# Altium PCB MB1520.PcbDoc (part 7 of 7)
Units mm, origin at the board's own origin, x right, y up, seen from the top; angles counter-clockwise.
Board outline 159 x 88 mm, 6 copper layers (Top Layer, Signal Layer 1, Signal Layer 2, Signal Layer 3, Signal Layer 4, Bottom Layer), stack 1.572 mm thick; 473 components, 377 nets, 1832 pads, 1378 vias.
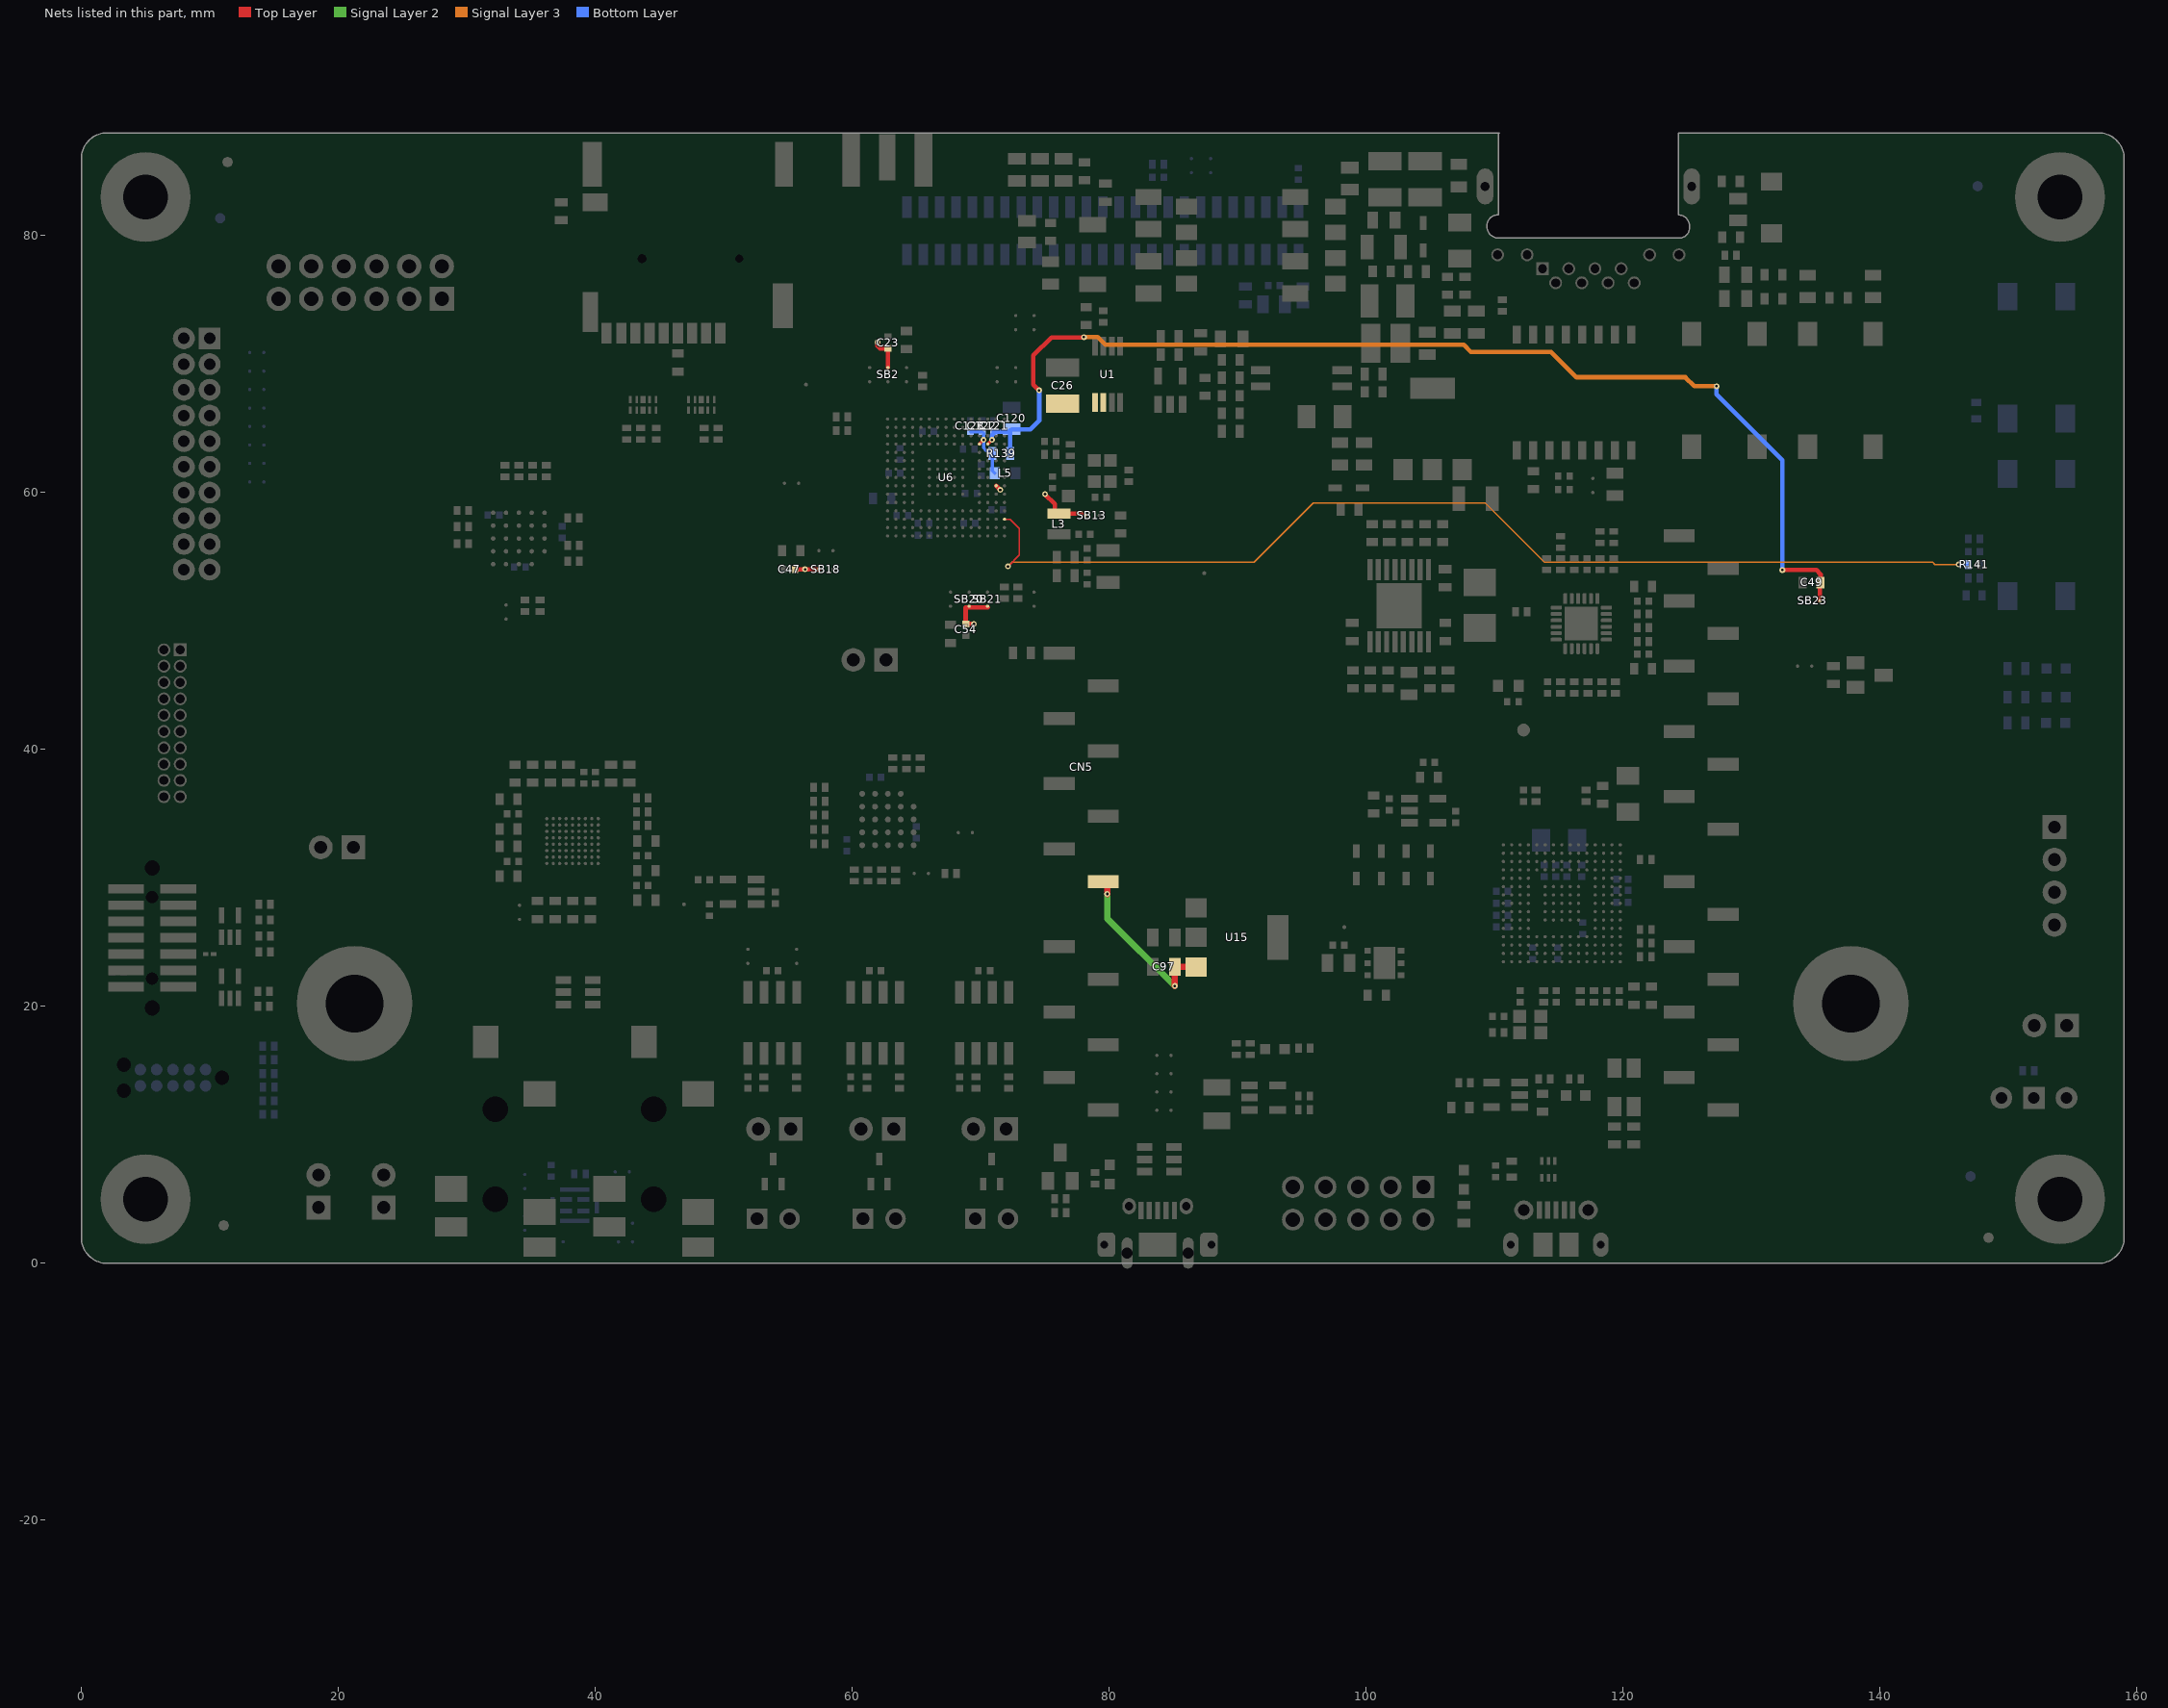
[diagram p10: the nets of this part, all layers, seen from the top]

## Via types
v1: diameter 0.45, hole 0.2, Top Layer to Bottom Layer, tented both sides, 1099 vias
v2: diameter 0.25, hole 0.1, Top Layer to Signal Layer 1, tented both sides, 217 vias
v3: diameter 0.25, hole 0.1, Signal Layer 4 to Bottom Layer, tented both sides, 53 vias
v4: diameter 0.6, hole 0.3, Top Layer to Bottom Layer, tented both sides, 9 vias

## Nets (pads, with @x,y where several pads share a name; then routed paths per layer and width w, separated by ;. In a path a pad name is that pad's centre, name@x,y a point inside that pad or via, vN(x,y) a via of type N, cw(c..) or ccw(c..) an arc to the next point about the centre after c; other vN are vias at no path point) (continued)
VDD_SDC: C23.1 C47.1 C54.1 L3.1 SB2.1 SB13.2 SB18.1 SB20.1 SB21.1 U6.G2 | length 12.3
  Top Layer w0.127: L3.1@75.775,58.65 L3.1@76.075,58.35
  Top Layer w0.35: C47.1@55.575,54.025 SB18.1@57.4,54.025 ; v1(61.975,71.7) 61.975,71.4 62.15,71.225 C23.1@62.775,71.225 SB2.1@62.775,69.725 ; C54.1@68.825,49.8 68.825,51.05 SB21.1@70.55,51.05 ; C54.1@68.85,49.775 v1(69.475,49.775) ; U6.G2@71.2,60.525 v1(71.525,60.2) ; v1(75,59.875) 75.775,59.1 L3.1@75.775,58.65 ; L3.1@76.075,58.35 77.85,58.35
  other v1: 56.325,54.025
VDDA: C122.2 C123.1 L5.2 R139.2 U6.M4 | length 5.2
  Top Layer w0.25: U6.M4@69.9,63.775 v1(70.225,64.1)
  Bottom Layer w0.25: C123.1@69.2,64.725 C122.2@70.125,64.725 70.225,64.625 v1(70.225,64.1) 70.225,63.475 70.432,63.268 70.682,63.268 R139.2@70.9,63.05 70.9,61.7 L5.2@71.1,61.5
VIN: C97.2 CN5.8 U15.3 | length 14
  Top Layer w0.508: CN5.8@79.54,29.72 79.85,29.411 v1(79.85,28.75) ; v1(85.1,21.596) C97.2@85.1,23.475 ; C97.2@85.1,23.075 U15.3@86.775,23.075
  Signal Layer 2 w0.508: v1(79.85,28.75) 79.85,26.846 v1(85.1,21.596)
VREF+: C26.2 C49.2 C120.2 C121.2 R139.1 SB23.2 U1.5 U1.6 U6.M3 | length 89
  Top Layer w0.25: U6.M3@70.55,63.775 v1(70.875,64.1)
  Top Layer w0.35: v1(74.55,67.95) 74.1,68.4 74.1,70.675 75.5,72.075 78,72.075 v1(78.025,72.1) ; v1(132.4,53.975) 135.05,53.975 135.375,53.65 C49.2@135.375,53 135.325,52.95 SB23.2@135.325,51.575
  Signal Layer 3 w0.35: v1(78.025,72.1) 79.1,72.1 79.7,71.5 107.6,71.5 108.15,70.95 114.4,70.95 116.375,68.975 124.85,68.975 125.55,68.275 v1(127.275,68.275)
  Bottom Layer w0.35: v1(70.875,64.1) 70.875,64.45 71.025,64.6 C121.2@71.025,64.725 72.2,64.725 C120.2@72.3,64.825 ; R139.1@72.3,63.05 C120.2@72.3,64.825 ; v1(74.55,67.95) 74.55,65.6 73.875,64.925 C120.2@72.4,64.925 C120.2@72.3,64.825 ; v1(127.275,68.275) 127.275,67.65 132.4,62.525 v1(132.4,53.975)
WAKEUP: R141.2 U6.C1 | length 83.5
  Top Layer w0.1: U6.C1@71.85,57.925 72.275,57.925 73,57.2 73,55.125 v1(72.125,54.25)
  Signal Layer 3 w0.12: v1(72.125,54.25) 72.45,54.575 91.275,54.575 95.875,59.175 109.275,59.175 113.875,54.575 144.1,54.575 144.275,54.4 v1(146.125,54.4)
  Bottom Layer w0.12: v1(146.125,54.4) R141.2@146.875,54.4
pads on no net: CN2.NPTH1 CN2.NPTH2 CN7.0 CN7.1 CN7.2 CN7.9 CN10.2 CN10.5 CN10.7 CN10.MT1 CN10.MT2 CN11.2 CN11.5 CN11.7 CN11.MT1 CN11.MT2 CN14.11 CN14.12 CN15.4 CN19.41 CN19.42 CN19.44 CN19.46 CN19.48 CN19.PTH1 CN19.PTH2 CN20.8 CN20.9 CN20.11 CN20.13 CN20.14 CN20.15 CN20.16 CN20.17 CN20.18 CN21.7 CN21.11 CN21.12 CN21.13 MIRE1.1 MIRE4.1 MIRE5.1 MIRE6.1 MIRE7.1 MIRE8.1 P1.9 P1.10 T3.4 T3.5 T3.12 T3.13 U3.1 U3.2 U5.4 U5.5 U5.6 U5.7 U7.A2 U7.A5 U7.B5 U7.C2 U7.C5 U9.4 U10.A2 U10.A3 U10.B1 U10.B5 U10.C5 U12.A6 U12.A8 U12.B4 U12.B5 U12.B8 U12.B9 U12.C4 U12.C5 U12.C7 U12.C8 U12.E1 U12.E5 U12.F4 U12.F5 U12.F6 U12.F8 U12.F9 U12.G4 U12.H2 U12.H3 U12.H4 U12.H5 U13.A1 U13.A2 U13.A3 U13.A4 U13.A5 U13.A6 U13.A8 U13.A9 U13.A10 U13.A11 U13.A12 U13.A13 U13.B1 U13.B2 U13.B3 U13.B4 U13.B5 U13.B6 U13.B7 U13.B8 U13.B9 U13.B10 U13.B11 U13.B12 U13.B13 U13.B14 U13.B15 U13.C2 U13.C3 U13.C4 U13.C11 U13.C12 U13.C13 U13.C14 U13.C15 U13.D1 U13.D2 U13.D3 U13.D4 U13.D10 U13.D11 U13.D13 U13.D14 U13.E1 U13.E2 U13.E3 U13.E4 U13.E12 U13.E13 U13.E14 U13.E15 U13.F1 U13.F4 U13.F14 U13.G4 U13.G14 U13.G15 U13.H1 U13.H2 U13.H3 U13.H4 U13.H14 U13.H15 U13.J2 U13.J3 U13.J4 U13.K1 U13.K2 U13.K3 U13.K12 U13.K14 U13.K15 U13.L1 U13.L3 U13.L12 U13.L13 U13.L14 U13.L15 U13.M2 U13.M3 U13.M4 U13.M5 U13.M6 U13.M7 U13.M12 U13.M13 U13.M14 U13.M15 U13.N2 U13.N4 U13.N5 U13.N6 U13.N7 U13.N11 U13.N13 U13.N14 U13.N15 U13.P2 U13.P4 U13.P5 U13.P6 U13.P7 U13.P8 U13.P9 U13.P10 U13.P11 U13.P12 U13.P13 U13.P14 U13.P15 U13.R2 U13.R3 U13.R6 U13.R7 U13.R8 U13.R9 U13.R10 U13.R11 U13.R12 U13.R13 U17.1 U17.4 U17.5 U25.5 U29.4 U33.6 U33.7 U33.8

## Polygon pours and split planes (outlines as drawn)
VREF+ on Top Layer "NO_TH" (solid, remove dead copper, pour order 14): 79.55,68.275 79.825,68 79.825,66.15 79.575,65.9 74.475,65.9 74.15,66.225 74.15,67.95 74.475,68.275
POE7 on Top Layer "NO_TH" (solid, remove dead copper, pour order 12): 81.5,66.05 81.5,69.6 80.75,70.35 78.65,70.35 77.475,71.525 77.475,73.425 77.775,73.725 80.025,73.725 80.2,73.9 80.2,74.575 79.675,75.1 76.95,75.1 74.55,72.7 74.55,69.125 75.225,68.45 79.675,68.45 79.925,68.2 79.925,66.125 80.1,65.95 81.4,65.95
3V3 on Top Layer "NO_TH" (solid, remove dead copper, pour order 58): 99.85,23.825 99.2,24.475 99.2,25.7 99.035,25.865 97.94,25.865 97.85,25.775 97.85,22.45 98.025,22.275 99.075,22.275 99.75,22.95 100.35,22.95 100.475,23.075 100.475,23.675 100.325,23.825
5V on Top Layer "NO_TH" (solid, remove dead copper, pour order 60): 100.425,21.65 100.725,21.35 100.725,20.225 100.45,19.95 99.125,19.95 98.875,20.2 98.875,21.875 99.775,22.775 100.3,22.775 100.425,22.65
POE4 on Top Layer "NO_TH" (solid, remove dead copper, pour order 2): 92.6,76.525 95.875,76.525 96.575,77.225 99.375,77.225 100.1,77.95 100.975,77.95 101.3,77.625 101.3,70.15 101.15,70 99.5,70 95.25,74.25 92.675,74.25 92.25,74.675 92.25,76.175
NetC73_1 on Top Layer "NO_TH" (solid, remove dead copper, pour order 0): 106.075,32.725 105.55,33.25 100.375,33.25 99.7,33.925 99.7,35.325 100.1,35.725 104.3,35.725 104.475,35.9 104.475,36.728 104.486,36.739 104.076,37.15 99.4,37.15 98.225,35.975 98.225,31.625 98.6,31.25 98.797,31.25 105.875,31.25 105.875,31.275 106.075,31.475
POE7 on Top Layer "NO_TH" (solid, remove dead copper, pour order 4): 87.125,79.275 81.45,79.275 80.875,79.85 80.875,84.65 80.275,85.25 71.975,85.25 71.525,85.7 71.525,86.675 72.1,87.25 84.575,87.25 87.525,84.3 87.525,79.675
POE5 on Top Layer "NO_TH" (solid, remove dead copper, pour order 6): 87.6,75.7 87.6,78.55 87,79.15 86.975,79.125 78.4,79.125 76.375,77.1 74.825,77.1 74.35,76.625 74.35,75.675 74.825,75.2 80.45,75.2 81.25,74.4 86.3,74.4 87.225,75.325
NetC11_2 on Top Layer "NO_TH" (solid, remove dead copper, pour order 8): 72.5,80.45 76.875,80.45 77.35,79.975 79.8,79.975 80.6,80.775 80.6,82.95 80.35,83.2 78.525,83.2 77.4,82.075 72.85,82.075 72.3,81.525 72.3,80.65
5V_POE on Top Layer "NO_TH" (solid, remove dead copper, pour order 10): 80.275,83.375 80.65,83.75 80.65,84.5 80.275,84.875 71.925,84.875 71.625,84.575 71.625,83.425 72,83.05 77.95,83.05 78.275,83.375
POE7 on Top Layer "POE7" (solid, remove dead copper, pour order 62): -4.2,1.825 -0.275,-2.1 158.55,-2.1 161.55,0.925 161.55,86.625 158.3,89.875 -1.95,89.875 -4.2,87.625
POE7 on Signal Layer 3 "POE7" (solid, remove dead copper, pour order 56): 1.2,91.4 157.075,91.4 160.6,87.875 160.6,0.575 156.55,-3.475 1.2,-3.475 -2.6,0.325 -2.6,87.6
AGND on Signal Layer 3 "NO_TH" (solid, remove dead copper, pour order 18): 106.75,51.475 105.85,51.475 105.55,51.775 105.55,52.846 104.546,53.85 100.125,53.85 99.6,53.325 99.6,49.025 100.775,47.85 100.775,43.05 100.525,42.8 98.825,42.8 98.336,43.289 98.336,56.186 101.025,58.875 105.25,58.875 106.45,57.675 106.45,53.45 107,52.9 107,51.725
NetC9_2 on Signal Layer 3 "NO_TH" (solid, remove dead copper, pour order 16): 100.25,53.55 104.3,53.55 105.326,52.524 105.326,50.974 107.775,48.525 107.775,43.7 107,42.925 101.475,42.925 101.075,43.325 101.075,48 99.975,49.1 99.975,53.275
POE1 on Signal Layer 1 "NO_TH" (solid, remove dead copper, pour order 22): 96.4,89.225 96.4,85.278 95.147,84.025 91.725,84.025 91.1,83.4 91.1,74.075 96.725,68.45 96.725,58.175 98.325,56.575 98.325,43.3 98.825,42.8 107.325,42.8 108.7,44.175 108.7,56.1 110.75,58.15 110.75,61.25 108.98,63.02 108.98,67.845 105.975,70.85 105.975,89.225
POE7 on Signal Layer 1 "POE7" (solid, remove dead copper, pour order 26): -0.5,89.1 158.625,89.1 161.55,86.175 161.55,-0.15 159.5,-2.2 0.45,-2.2 -2.725,0.975 -2.725,86.875
3V3 on Signal Layer 2 "3V3" (solid, remove dead copper, pour order 54): 159.225,89.225 160.875,87.575 160.875,-0.05 156.725,-4.2 1.425,-4.2 -2.025,-0.75 -1.275,0 -1.275,88.725 -0.775,89.225
5V_POE on Signal Layer 2 "5V_PoE" (solid, remove dead copper, pour order 50): 75.775,84.25 76.15,83.875 76.15,74.1 78.75,71.5 83.7,71.5 85.575,73.375 94.85,73.375 95.75,72.35 95.75,39.25 104.025,30.975 104.025,17.05 100.675,13.7 100.675,10.475 99.9,9.7 99.2,9.7 98.85,10.05 98.85,13.5 102.675,17.325 102.675,29.85 93.825,38.7 93.825,70.4 92.675,71.525 86.075,71.525 84.475,69.85 75.175,69.85 72.675,72.35 72.675,83.925 73,84.25
5V on Signal Layer 2 "5V" (solid, remove dead copper, pour order 52): 71.1,32.15 76.625,37.675 76.625,38.525 76.35,38.8 75.85,38.8 69.675,32.625 69.675,29.675 67.25,27.25 64.65,27.25 52.775,27.25 50.8,25.275 50.8,23.775 53.875,20.7 62.7,20.7 68.6,14.8 68.6,9.8 65.775,6.975 15.25,6.975 1.175,21.05 1.175,29.1 3.725,31.65 3.725,49.1 5.75,51.125 9.275,51.125 12.075,53.925 12.075,79.475 18.575,85.975 77.65,85.975 79.325,84.3 79.325,73.4 80.5,72.225 81.725,72.225 85.375,75.875 90.95,75.875 92.425,77.35 92.425,86.4 90.075,88.75 0.425,88.75 -0.3,88.025 -0.3,0.425 2.275,-2.15 124.55,-2.15 127.225,0.525 127.225,26.25 124.6,28.875 122.25,28.875 121.6,28.225 121.6,25.95 124.175,23.375 124.175,17.025 121.975,14.825 104.9,14.825 103.625,13.55 103.625,8.525 101.9,6.8 91.25,6.8 87.5,3.05 73.475,3.05 71.1,5.425
VDD_SDC on Signal Layer 2 "VDD_SDC" (solid, remove dead copper, pour order 44): 52.75,57.675 55.65,57.675 56.025,57.3 56.025,53.825 56.225,53.625 61.45,53.625 61.675,53.85 61.675,61.075 64.7,64.1 67.525,64.1 69.1,62.525 69.1,49.5 69.225,49.375 70.325,49.375 70.325,49.5 71.575,50.775 71.575,56.2 73.95,58.575 75.475,58.575 75.675,58.6 77.725,60.65 78.65,60.65 79.05,61.05 79.05,62.544 77.644,63.95 72.825,63.95 69.425,67.35 67.25,67.35 63.775,70.825 61.8,72.8 59.9,72.8 59.025,71.9 59.025,66.95 56.25,64.175 52.825,64.175 51.125,62.475 51.125,59.3
VDD_MCU on Signal Layer 2 "VDD_MCU" (solid, remove dead copper, pour order 42): 61.525,48.717 64.533,51.725 66.521,51.725 66.9,52.104 66.9,52.425 61.65,57.675 59.4,57.675 57.425,59.65 53.875,59.65 52.975,60.55 52.975,61 53.35,61.375 60.15,61.375 60.75,61.975 60.75,71.15 61.025,71.425 61.4,71.425 61.65,71.175 61.65,66.275 63.275,64.65 69.475,64.65 69.875,64.25 69.875,63.625 71.45,62.05 77.825,62.05 78.025,61.85 78.025,61.55 77.8,61.325 70.925,61.325 70.725,61.125 70.725,58.25 70.1,57.625 69.45,57.625 69,57.15 69,51.025 63.58,45.605 61.82,45.605 61.525,45.9
USB_FS_VBUS on Signal Layer 2 "USB_FS_VBUS" (solid, remove dead copper, pour order 40): 61.7,42.2 74.725,42.2 77.15,39.775 77.15,11.525 76.55,10.925 76.55,4.125 77.3,3.325 86.925,3.325 90.725,7.125 101.425,7.125 102.725,8.425 102.725,13.55 105.6,16.425 105.6,29.075 105.15,29.525 105.125,29.5 104.636,29.5 104.225,29.089 104.225,16.95 100.875,13.6 100.875,10.375 98.675,8.175 89.65,8.175 88.6,9.225 88.6,15.175 88.275,15.5 87.6,15.5 87.225,15.125 87.225,9.05 86.1,7.925 80.725,7.925 79.575,6.775 78.7,6.775 78.025,7.45 78.025,10.3 78.625,10.9 78.625,40.45 75.75,43.325 63.875,43.325 58.3,43.325 54.925,46.7 54.925,55.225 53.925,56.225 53.5,56.225 53.275,56 53.275,46.675 57.75,42.2
3V3_STLK on Signal Layer 2 "3V3_STLK" (solid, remove dead copper, pour order 32): 105.025,39.925 105.6,39.925 105.85,39.675 105.85,34.375 107.95,32.275 117.675,32.275 118.5,31.45 119.7,31.45 147.925,31.45 151.85,35.375 154.181,35.375 155.025,34.531 155.025,33.15 154.45,32.575 152.025,32.575 149.25,29.8 120,29.8 119.375,29.175 119.375,23.25 120.225,22.4 123.5,22.4 123.775,22.125 123.775,21.575 123.439,21.239 120.301,21.239 119.775,20.714 119.775,16.3 119.475,16 119.025,16 118.725,16.3 118.725,19.475 117.65,20.55 113.025,20.55 109.7,17.225 109.025,17.225 108.65,17.6 108.675,17.625 108.675,18.7 110.875,20.9 110.875,29.7 109.775,30.8 107.4,30.8 104.85,33.35 104.85,39.75
E5V on Signal Layer 2 "E5V" (solid, remove dead copper, pour order 38): 76.875,46.775 80.8,42.85 80.8,35.3 80.775,35.3 87.925,28.15 99.875,28.15 101,29.275 101.375,29.275 101.525,29.125 101.525,28.7 99.375,26.55 97.875,26.55 95.75,24.425 95.75,15.925 97.15,14.525 97.15,10.175 97,10.025 96.7,10.025 96.2,10.525 96.2,13.975 94.4,15.775 94.4,21.775 90.725,25.45 85.025,25.45 84.15,26.325 84.15,29.85 79.425,34.575 79.425,42.475 76.425,45.475 73.175,45.475 72.925,45.725 72.925,46.525 73.175,46.775
1V8 on Signal Layer 2 "1V8" (solid, remove dead copper, pour order 30): 47.675,27.575 45.975,29.275 41.45,29.275 39,31.725 34.625,31.725 34.475,31.875 34.475,32.3 35.325,33.15 35.325,34.325 34.625,35.025 34.625,35.425 34.8,35.6 36.725,35.6 42.25,30.075 46.675,30.075 48.45,28.3 48.45,27.75 48.275,27.575
NetC34_1 on Signal Layer 2 "NO_TH" (solid, remove dead copper, pour order 24): 112.175,43.225 119.05,43.225 120.775,44.95 120.775,47.9 120.325,48.35 119.3,48.35 117.85,46.9 113.925,46.9 111.9,44.875 111.9,43.5
POE7 on Signal Layer 4 "POE7" (solid, remove dead copper, pour order 28): 0.2,88.775 159.9,88.775 161.025,87.65 161.025,0.625 159.225,-1.175 -0.4,-1.175 -1.575,0 -1.575,87
POE1 on Signal Layer 4 "NO_TH" (solid, remove dead copper, pour order 20): 96.4,89.225 96.4,85.278 95.147,84.025 91.725,84.025 91.1,83.4 91.1,74.075 96.725,68.45 96.725,58.175 98.325,56.575 98.325,43.3 98.825,42.8 107.325,42.8 108.7,44.175 108.7,56.1 110.75,58.15 110.75,61.25 108.98,63.02 108.98,67.845 105.975,70.85 105.975,89.225
POE7 on Bottom Layer "POE7" (solid, remove dead copper, pour order 36): 0.275,88.7 159.475,88.7 160.575,87.6 160.575,-0.15 159.05,-1.675 1.175,-1.675 -0.925,0.425 -0.925,87.35 -0.925,87.5
5V_USB_CHGR on Bottom Layer "5V_USB_CHGR" (solid, remove dead copper, pour order 34): 118.125,8.3 118.125,15.425 117.925,15.625 117.275,15.625 117.075,15.425 117.075,9.425 116.025,8.375 114.825,7.175 109.4,7.175 108.775,7.8 108.775,15.45 107.15,17.075 107.15,29.3 105.7,30.75 99.475,30.75 98.575,29.85 98.575,28.7 98.75,28.525 99.675,28.525 100.95,29.8 105.2,29.8 105.85,29.15 105.85,15.2 107.575,13.475 107.575,9.575 106.15,8.15 93.6,8.15 92.605,7.155 92.605,4.945 93.375,4.175 106.2,4.175 107.425,5.4 115.225,5.4

## Keep-outs
Keep-Out Layer:
  rectangle: 136.4,2.168 144.9,4.143

## Other copper
Top Layer:
  rectangle net POE7: 81.471,79.873 84.62,81.143
  rectangle net POE7: 81.471,82.372 84.62,83.642
  rectangle net POE1: 92.901,82.372 96.05,83.642
  rectangle net POE2: 92.901,79.873 96.05,81.143
  rectangle net POE3: 92.901,77.373 96.05,78.643
  rectangle net POE4: 92.901,74.873 96.05,76.143
  rectangle net POE5: 81.471,74.873 84.62,76.143
  rectangle net POE5: 81.471,77.373 84.62,78.643
  rectangle net POE1: 105.575,53.453 106.744,54.621
  rectangle net AGND: 105.575,52.053 106.744,53.221
  text "1" at 136.693,2.571 h2
  text ".Layer_Name" at 36.253,-23.408 h3
  text ".GTL" at 77.948,-23.408 h3
Signal Layer 1:
  text "2" at 137.943,2.571 h2
  text ".Layer_Name" at 36.253,-23.408 h3
  text ".G1" at 77.948,-23.408 h3
Signal Layer 2:
  text "3" at 139.443,2.571 h2
  text ".Layer_Name" at 36.253,-23.408 h3
  text ".G2" at 77.948,-23.408 h3
Signal Layer 3:
  text "4" at 141.693,2.571 h2
  text ".Layer_Name" at 36.285,-23.391 h3
  text ".G3" at 77.98,-23.391 h3
Signal Layer 4:
  text "5" at 143.193,2.571 h2
  text ".Layer_Name" at 36.285,-23.391 h3
  text ".G4" at 77.98,-23.391 h3
Bottom Layer:
  text "6" at 144.693,2.571 h2
  text ".GBL" at 66.745,-23.44 h3
  text ".Layer_Name" at 108.059,-23.44 h3

## Silkscreen, mask and mechanical layers (free items; w line width, h text height)
Top Overlay:
  lines w0.1: 2.675,31.925 2.675,33.45 8.35,33.45 8.35,31.925 2.675,31.925 ; 12.224,59.926 12.224,66.426 14.574,66.426 14.574,59.926 12.224,59.926 ; 17.625,8.433 19.325,8.433 19.325,14.5 17.625,14.5 17.625,8.433 ; 19.125,71.1 23.9,71.1 23.9,72.775 19.125,72.775 19.125,71.1 ; 22.775,8.55 24.3,8.55 24.3,13.875 22.775,13.875 22.775,8.55 ; 25.625,7.725 27.15,7.725 27.15,14.15 25.625,14.15 25.625,7.725 ; 26.575,26.3 26.575,29 32.05,29 32.05,26.3 26.575,26.3 ; 36.9,83.975 36.9,87.25 38.425,87.25 38.425,83.975 36.9,83.975 ; 38.175,51.775 38.175,53.5 45.234,53.5 45.234,51.775 38.175,51.775 ; 38.25,9.65 39.775,9.65 39.775,14.85 38.25,14.85 38.25,9.65 ; 50.9,0.325 50.9,1.85 56.925,1.85 56.925,0.325 50.9,0.325 ; 55.425,38.35 55.425,39.875 61.775,39.875 61.775,38.35 55.425,38.35 ; 56.95,81.65 56.95,87.05 58.475,87.05 58.475,81.65 56.95,81.65 ; 59.2,0.35 59.2,1.775 65.225,1.775 65.225,0.35 59.2,0.35 ; 67.925,0.35 67.925,1.875 73.95,1.875 73.95,0.35 67.925,0.35 ; 88.75,0.275 90.275,0.275 90.275,5.425 88.75,5.425 88.75,0.275 ; 91.05,1.65 92.575,1.65 92.575,7.45 91.05,7.45 91.05,1.65 ; 119.625,0.675 119.625,2.2 123.4,2.2 123.4,0.675 119.625,0.675 ; 126.3,86.125 126.3,87.65 133.8,87.65 133.8,86.125 126.3,86.125
  lines w0.152: 2.127,73.12 2.458,73.12 ; 2.254,52.8 2.585,52.8 ; 2.889,73.12 3.22,73.12 ; 3.016,52.8 3.347,52.8 ; 3.931,73.12 4.261,73.12 ; 4.058,52.8 4.388,52.8 ; 4.693,73.12 5.023,73.12 ; 4.82,52.8 5.15,52.8 ; 5.607,52.8 6.674,52.8 ; 5.633,53.283 5.633,54.349 ; 5.633,55.264 5.633,56.331 ; 5.633,57.321 5.633,58.388 ; 5.633,59.252 5.633,60.318 ; 5.633,61.233 5.633,62.3 ; 5.633,63.189 5.633,64.255 ; 5.633,65.373 5.633,66.44 ; 5.633,67.405 5.633,68.472 ; 5.633,69.335 5.633,70.402 ; 5.633,71.367 5.633,72.434 ; 5.633,73.12 6.699,73.12 ; 7.207,52.825 8.274,52.825 ; 7.207,73.12 8.274,73.12 ; 8.935,52.825 10.001,52.825 ; 9.011,73.12 10.078,73.12 ; 10.89,73.12 11.199,73.126 ; 10.916,52.8 11.326,52.806 ; 11.377,54.172 11.377,55.238 ; 11.377,56 11.377,57.067 ; 11.377,58.032 11.377,59.099 ; 11.377,59.988 11.377,61.055 ; 11.377,61.969 11.377,63.036 ; 11.377,63.925 11.377,64.992 ; 11.377,65.932 11.377,66.999 ; 11.377,67.786 11.377,68.853 ; 11.377,69.615 11.377,70.682 ; 11.377,71.52 11.377,72.587 ; 13.7,74.367 13.7,73.3 14.767,73.3 ; 13.7,75.332 13.7,76.399 ; 13.7,77.288 13.7,78.355 ; 13.7,80.336 13.7,79.269 14.767,79.269 ; 13.7,81.225 13.7,82.292 ; 13.7,83.231 13.7,84.298 ; 13.7,85.086 13.7,86.152 ; 15.732,73.3 16.799,73.3 ; 15.732,79.269 16.799,79.269 ; 17.688,73.3 18.755,73.3 ; 17.688,79.269 18.755,79.269 ; 19.669,73.3 20.736,73.3 ; 19.669,79.269 20.736,79.269 ; 21.625,73.3 22.692,73.3 ; 21.625,79.269 22.692,79.269 ; 23.631,73.3 24.698,73.3 ; 23.631,79.269 24.698,79.269 ; 25.486,73.3 26.552,73.3 ; 25.486,79.269 26.552,79.269 ; 27.314,73.3 28.381,73.3 ; 27.314,79.269 28.381,79.269 ; 29.219,73.3 29.575,73.3 ; 29.219,79.269 29.575,79.269 ; 29.575,73.323 29.575,74.389 ; 29.575,75.177 29.575,76.244 ; 29.575,77.183 29.575,78.25 ; 29.575,79.139 29.575,80.206 ; 29.575,81.12 29.575,82.187 ; 29.575,83.076 29.575,84.143 ; 29.575,85.108 29.575,86.175
  text "ETHERNET" at 126.475,86.412 h1.5
  text "µSD" at 38.05,84.45 h1.5 r90
  text "ADC_IN" at 58.075,81.775 h1.5 r90
  text "P1" at 30.075,76.3 h1.2
  text "PMOD" at 19.6,71.475 h1.5
  text "STMOD+" at 13.824,60.526 h1.5 r90
  text "D15" at 129.5,56.175 h1.5
  text "C" at 138.35,55 h12
  text "D14" at 129.5,53.625 h1.5
  text "HyperRAM" at 38.575,52.225 h1.5
  text "P2" at 2.85,51.575 h1.2
  text "AVDD" at 129.5,51.125 h1.5
  text "GND" at 129.5,48.575 h1.5
  text "E5V" at 81,47.1 h1.5
  text "D13" at 129.5,46 h1.5
  text "IOREF" at 81,44.55 h1.5
  text "D12" at 129.5,43.475 h1.5
  text "NRST" at 81,42.025 h1.5
  text "D11" at 129.5,40.85 h1.5
  text "E" at 143.15,40.825 h11
  text "I" at 150.675,40.075 h12
  text "3V3" at 81,39.425 h1.5
  text "OCTOSPI" at 55.6,38.6 h1.5
  text "D10" at 129.5,38.4 h1.5
  text "5V" at 81,36.875 h1.5
  text "D9" at 129.5,35.875 h1.5
  text "GND" at 81,34.25 h1.5
  text "K" at 134.45,34.2 h12
  text "3V3" at 149.5,33.4 h1.5
  text "D8" at 129.5,33.325 h1.5
  text "STDC14" at 3,32.225 h1.5
  text "GND" at 81,31.675 h1.5
  text "SWCLK" at 147.3,31.025 h1.5
  text "D7" at 129.5,29.325 h1.5
  text "VIN" at 81,29.3 h1.5
  text "GND" at 149.05,28.5 h1.5
  text "D6" at 129.5,26.675 h1.5
  text "AUDIO / CODEC" at 26.95,26.525 h1.5
  text "H" at 134.35,25.95 h12
  text "SWDIO" at 147.525,25.8 h1.5
  text "A0" at 81,24.275 h1.5
  text "D5" at 129.5,24.15 h1.5
  text "A1" at 81,21.6 h1.5
  text "D4" at 129.5,21.575 h1.5
  text "D3" at 129.5,19.075 h1.5
  text "A2" at 81,19.05 h1.5
  text "A3" at 81,16.525 h1.5
  text "D2" at 129.5,16.525 h1.5
  text "D1" at 129.5,14.05 h1.5
  text "A4" at 81,14 h1.5
  text "A5" at 81,11.475 h1.5
  text "D0" at 129.5,11.475 h1.5
  text "LINE IN" at 39.475,10 h1.5 r90
  text "SPK left" at 24.025,8.725 h1.5 r90
  text "SPK right" at 18.825,8.575 h1.5 r90
  text "LINE OUT" at 27,7.925 h1.5 r90
  text "CHGR" at 94.875,7.475 h1.5 r90
  text "E5V" at 97.425,7.475 h1.5 r90
  text "POE5V" at 99.975,7.475 h1.5 r90
  text "USBFS" at 102.575,7.475 h1.5 r90
  text "STLK" at 104.925,7.475 h1.5 r90
  text "G" at 130.45,5 h11.4
  text "F" at 142.45,5 h12
  text "5V PWR" at 92.295,2.075 h1.5 r90
  text "STLK" at 119.825,0.925 h1.5
  text "FDCAN3" at 51.4,0.625 h1.5
  text "FDCAN2" at 59.6,0.625 h1.5
  text "FDCAN1" at 68.475,0.625 h1.5
  text "USB FS" at 90,0.5 h1.5 r90
  text ".Layer_Name" at 36.253,-23.408 h3
  text ".GTO" at 77.948,-23.408 h3
Bottom Overlay:
  drawing of 291 lines, arcs and shapes, not listed
  text "PMOD" at 30.3,83.325 h1.5 r270
  text "STMOD+" at 6.25,75.9 h1.5
  text "RST" at 157.175,69.55 h1.5 r270
  text "USER" at 157.1,55.1 h1.5 r270
  text "USER LEDs" at 144.325,40.625 h1.5 r270
  text "MB1299" at 2.875,40.1 h1.5 r270
  text "3V3" at 151.625,33.45 h1.5
  text "SWCLK" at 151.725,30.975 h1.5
  text "CN7" at 7.575,28.875 h1.2 r270
  text "GND" at 151.7,28.5 h1.5
  text "SWDIO" at 151.7,25.95 h1.5
  text "CN6" at 154.7,23.775 h1.2
  text "JP3" at 154.475,20.15 h1.2
  text "STDC14" at 7.375,20.1 h1.5 r270
  text "CN11" at 48.2,10.85 h1.2 r270
  text "CN10" at 27.75,9.825 h1.2 r270
  text "JP4" at 56.875,9.375 h1.2 r270
  text "JP5" at 64.925,9.35 h1.2 r270
  text "JP6" at 73.775,9.35 h1.2 r270
  text "SYS MEM" at 158.694,9.14 h1.5
  text "SPK Right" at 18.95,8.375 h1.5 r270
  text "SPK Left" at 23.05,8.375 h1.5 r270
  text "TAG" at 11.1,8.225 h1.5
  text "J" at 142.45,7.825 h15
  text "JP7" at 104.925,7.625 h1.2
  text "CN14" at 85.3,7.175 h1.2
  text "CN15" at 115.925,7.1 h1.2
  text "MB1520B" at 142.65,6 h1.5
  text "USB FS" at 86.2,5.8 h1.5
  text "STLK" at 116.275,5.775 h1.5
  text "CN12" at 15.85,3.8 h1.2 r270
  text "CN13" at 21.1,3.8 h1.2 r270
  text "CN18" at 73.7,1.85 h1.2 r270
  text "CN16" at 56.6,1.8 h1.2 r270
  text "CN17" at 65,1.8 h1.2 r270
  text "LINE OUT" at 27.675,1.4 h1.5 r270
  text "LINE IN" at 48.275,0.975 h1.5 r270
  text "Power Header" at 103.475,0.8 h1.5
  text "FDCAN1" at 73.25,0.775 h1.5
  text "FDCAN3" at 56.425,0.725 h1.5
  text "FDCAN2" at 64.7,0.725 h1.5
  text ".GBO" at 66.745,-23.44 h3
  text ".Layer_Name" at 108.059,-23.44 h3
Top Paste:
  text ".Layer_Name" at 36.226,-23.398 h3
  text ".GTP" at 77.921,-23.398 h3
Bottom Paste:
  text ".GBP" at 66.636,-23.425 h3
  text ".Layer_Name" at 107.95,-23.425 h3
Top Solder:
  rectangle: 136.4,2.168 144.9,4.143
  rectangle: 92.85,82.321 96.101,83.693
  rectangle: 92.85,79.822 96.101,81.194
  rectangle: 92.85,77.322 96.101,78.694
  rectangle: 92.85,74.823 96.101,76.195
  rectangle: 81.42,74.823 84.671,76.195
  rectangle: 81.42,77.322 84.671,78.694
  rectangle: 81.42,79.822 84.671,81.194
  rectangle: 81.42,82.321 84.671,83.693
  rectangle: 105.525,53.402 106.795,54.672
  rectangle: 105.525,52.002 106.795,53.272
  text ".Layer_Name" at 36.251,-23.473 h3
  text ".GTS" at 77.946,-23.473 h3
Bottom Solder:
  rectangle: 136.4,2.168 144.9,4.168
  text ".GBS" at 66.661,-23.5 h3
  text ".Layer_Name" at 107.975,-23.5 h3
M1-Board Shape:
  lines w0.1: 124.303,88 157,88 cw(c157,86) 159,86 159,2 cw(c157,2) 157,0 2,0 cw(c2,2) 0,2 0,86 cw(c2,86) 2,88 110.367,88 110.303,87.936 110.303,81.611 110.242,81.611 ccw(c110.242,80.772) 109.403,80.772 109.403,80.71 ccw(c110.303,80.71) 110.303,79.811 124.303,79.811 ; 124.303,88.011 cw(c124.303,88.005) 124.308,88.005 ; 124.308,88 124.308,81.61 cw(c124.308,80.742) 125.177,80.742 125.177,80.62 cw(c124.368,80.62) 124.368,79.811 124.303,79.811 ; 124.303,79.811 ccw(c124.303,79.811) 124.303,79.811
M2-Board Dimensions:
  text ".Layer_Name" at 36.253,-23.408 h3
  text ".GM2" at 77.948,-23.408 h3
M14-Top Assembly:
  text ".Layer_Name" at 36.253,-23.408 h3
  text ".GM14" at 77.948,-23.408 h3
M15-Bottom Assembly:
  text ".GM15" at 66.745,-23.44 h3
  text ".Layer_Name" at 108.059,-23.44 h3
Drill Drawing:
  drawing of 445 lines, arcs and shapes, not listed
  text "Layer" at 187.864,152.236 h1.52
  text "Name" at 194.241,152.236 h1.52
  text "Material" at 206.575,152.236 h1.52
  text "Thickness" at 217.658,152.236 h1.52
  text "Constant" at 226.762,152.236 h1.52
  text "Board Layer Stack" at 235.188,152.236 h1.52
  text "PCB SPECIFICATIONS :" at 0.825,151.404 h3
  text "PCB : TYPE 3" at 149.237,151.172 h3
  text "1" at 187.864,149.188 h1.52
  text "Top Overlay" at 194.241,149.188 h1.52
  text "A.   MATERIAL :" at 0.825,147.404 h3
  text "FR-4" at 39.325,147.404 h3
  text "TG-170" at 55.825,147.404 h3
  text "X  TG-150" at 74.075,147.404 h3
  text "TG-140" at 90.075,147.404 h3
  text "2" at 187.864,146.14 h1.52
  text "Top Solder" at 194.241,146.14 h1.52
  text "Solder Resist" at 206.575,146.14 h1.52
  text "0,015mm" at 217.658,146.14 h1.52
  text "3,5" at 226.762,146.14 h1.52
  text "ASPECT-RATIO, AXE Z :" at 149.237,145.672 h3
  text "B.   MATERIAL FAMILY :" at 0.825,144.404 h3
  text "N/A" at 39.325,144.404 h3
  text "3" at 187.864,143.092 h1.52
  text "Top Layer" at 194.241,143.092 h1.52
  text "Copper" at 206.575,143.092 h1.52
  text "0,042mm" at 217.658,143.092 h1.52
  text "C.   SOLDERMASK COLOR :" at 0.825,141.404 h3
  text "GREEN" at 39.325,141.404 h3
  text "WHITE" at 55.825,141.404 h3
  text "X  BLUE" at 74.075,141.404 h3
  text "BLACK" at 90.075,141.404 h3
  text "4" at 187.864,140.044 h1.52
  text "Dielectric1" at 194.241,140.044 h1.52
  text "FR-4" at 206.575,140.044 h1.52
  text "0,099mm" at 217.658,140.044 h1.52
  text "4,2" at 226.762,140.044 h1.52
  text "6:1 to 8:1 / LEVEL \"B\"" at 149.255,138.924 h3
  text "D.   SILKSCREEN COLOR :" at 0.825,138.404 h3
  text "X  WHITE" at 39.325,138.404 h3
  text "YELLOW" at 55.825,138.404 h3
  text "BLACK" at 74.075,138.404 h3
  text "Blue ink PANTONE 2955" at 90.075,138.404 h3
  text "5" at 187.864,136.996 h1.52
  text "Signal Layer 1" at 194.241,136.996 h1.52
  text "Copper" at 206.575,136.996 h1.52
  text "0,035mm" at 217.658,136.996 h1.52
  text "E.   SURFACE FINISH :" at 0.825,135.404 h3
  text "X  ENIG" at 39.325,135.404 h3
  text "IMMERSION SILVER" at 55.825,135.404 h3
  text "IMMERSION TIN" at 90.075,135.404 h3
  text "6" at 187.864,133.948 h1.52
  text "Dielectric 2" at 194.241,133.948 h1.52
  text "0,102mm" at 217.658,133.948 h1.52
  text "4,2" at 226.762,133.948 h1.52
  text "MINIMUM PARAMETERS" at 149.282,133.323 h3
  text "HASL" at 39.325,132.404 h3
  text "HASL (PB-FREE)" at 55.825,132.404 h3
  text "GOLDEN FINGER" at 90.075,132.404 h3
  text "7" at 187.864,130.9 h1.52
  text "Signal Layer 2" at 194.241,130.9 h1.52
  text "Copper" at 206.575,130.9 h1.52
  text "0,035mm" at 217.658,130.9 h1.52
  text "F.   IMPEDANCE CONTROL :" at 0.825,129.404 h3
  text "NO" at 39.325,129.404 h3
  text "X  YES  (SEE IMPEDANCE TABLE FOR DETAIL INFORMATION)" at 55.825,129.404 h3
  text "8" at 187.864,127.852 h1.52
  text "Dielectric 3" at 194.241,127.852 h1.52
  text "FR-4" at 206.575,127.852 h1.52
  text "0,946mm" at 217.658,127.852 h1.52
  text "4,2" at 226.762,127.852 h1.52
  text "DEFAULT" at 149.282,127.823 h3
  text "G.   THROUGH VIA :" at 0.825,126.404 h3
  text "PLUG THE VIAS WHICH ARE COVERED WITH SOLDERMASK ONE OR TWO SIDE." at 39.325,126.404 h3
  text "9" at 187.864,124.804 h1.52
  text "Signal Layer 3" at 194.241,124.804 h1.52
  text "Copper" at 206.575,124.804 h1.52
  text "0,035mm" at 217.658,124.804 h1.52
  text "PLUG MATERIAL :" at 39.325,123.404 h3
  text "X  SOLDERMASK" at 64.825,123.404 h3
  text "NON-CONDUCTIVE EPOXY." at 90.075,123.404 h3
  text "TRACKS : 0.12mm           / GAPS : 0.12mm" at 149.282,122.073 h3
  text "10" at 187.864,121.756 h1.52
  text "Dielectric 4" at 194.241,121.756 h1.52
  text "0,102mm" at 217.658,121.756 h1.52
  text "4,2" at 226.762,121.756 h1.52
  text "H.   STACK-UP :" at 0.825,120.404 h3
  text "SEE LAYER STACK-UP SEQUENCE FOR OVERALL THICKNESS." at 39.325,120.404 h3
  text "11" at 187.864,118.708 h1.52
  text "Signal Layer 4" at 194.241,118.708 h1.52
  text "Copper" at 206.575,118.708 h1.52
  text "0,035mm" at 217.658,118.708 h1.52
  text "MCU / BGA" at 149.3,116.525 h3
  text "12" at 187.864,115.66 h1.52
  text "Dielectric 5" at 194.241,115.66 h1.52
  text "FR-4" at 206.575,115.66 h1.52
  text "0,099mm" at 217.658,115.66 h1.52
  text "4,2" at 226.762,115.66 h1.52
  text "« THE COMPONENTS WITH PLATED THROUGH HOLE (PTH) MAY BE WELDED (CABLED) IN \"PIN-IN-PASTE\" MODE (IF NECESSARY) »" at 12.8,113.85 h2
  text "13" at 187.864,112.612 h1.52
  text "Bottom Layer" at 194.241,112.612 h1.52
  text "Copper" at 206.575,112.612 h1.52
  text "0,042mm" at 217.658,112.612 h1.52
  text "TRACKS : 0.09mm           / GAPS : 0.08mm" at 149.3,110.775 h3
  text "14" at 187.864,109.564 h1.52
  text "Bottom Solder" at 194.241,109.564 h1.52
  text "Solder Resist" at 206.575,109.564 h1.52
  text "0,015mm" at 217.658,109.564 h1.52
  text "3,5" at 226.762,109.564 h1.52
  text "15" at 187.864,106.516 h1.52
  text "Bottom Overlay" at 194.241,106.516 h1.52
  text "Symbol" at 176.445,95.491 h3
  text "Count" at 188.197,95.491 h3
  text "Hole Size" at 201.482,95.491 h3
  text "Plated" at 224.389,95.491 h3
  text "Hole Type" at 234.705,95.491 h3
  text "Drill Layer Pair" at 249.725,95.491 h3
  text "Via/Pad" at 278.192,95.491 h3
  text "Hole Length" at 290.499,95.491 h3
  text "Routed Path Length" at 312.121,95.491 h3
  text "1099" at 188.197,90.314 h2.5
  text "0,20mm (7,87mil)" at 201.482,90.314 h2.5
  text "PTH" at 224.389,90.314 h2.5
  text "Round" at 234.705,90.314 h2.5
  text "Top Layer - Bottom Layer" at 249.725,90.314 h2.5
  text "Via" at 278.192,90.314 h2.5
  text "-" at 290.499,90.314 h2.5
  text "-" at 312.121,90.314 h2.5
  text "9" at 188.197,85.136 h2.5
  text "0,30mm (11,81mil)" at 201.482,85.136 h2.5
  text "PTH" at 224.389,85.136 h2.5
  text "Round" at 234.705,85.136 h2.5
  text "Top Layer - Bottom Layer" at 249.725,85.136 h2.5
  text "Via" at 278.192,85.136 h2.5
  text "-" at 290.499,85.136 h2.5
  text "-" at 312.121,85.136 h2.5
  text "4" at 188.197,79.959 h2.5
  text "0,60mm (23,62mil)" at 201.482,79.959 h2.5
  text "PTH" at 224.389,79.959 h2.5
  text "Slot" at 234.705,79.959 h2.5
  text "Top Layer - Bottom Layer" at 249.725,79.959 h2.5
  text "Pad" at 278.192,79.959 h2.5
  text "1,30mm (51,18mil)" at 290.499,79.959 h2.5
  text "0,70mm (27,56mil)" at 312.121,79.959 h2.5
  text "2" at 188.197,74.781 h2.5
  text "0,65mm (25,59mil)" at 201.482,74.781 h2.5
  text "PTH" at 224.389,74.781 h2.5
  text "Slot" at 234.705,74.781 h2.5
  text "Top Layer - Bottom Layer" at 249.725,74.781 h2.5
  text "Pad" at 278.192,74.781 h2.5
  text "0,85mm (33,47mil)" at 290.499,74.781 h2.5
  text "0,20mm (7,88mil)" at 312.121,74.781 h2.5
  text "A" at 175.504,74.528 h2.3
  text "1" at 188.197,69.604 h2.5
  text "0,65mm (25,59mil)" at 201.482,69.604 h2.5
  text "NPTH" at 224.389,69.604 h2.5
  text "Round" at 234.705,69.604 h2.5
  text "Top Layer - Bottom Layer" at 249.725,69.604 h2.5
  text "Pad" at 278.192,69.604 h2.5
  text "-" at 290.499,69.604 h2.5
  text "-" at 312.121,69.604 h2.5
  text "O" at 175.504,69.35 h2.3
  text "1" at 188.197,64.426 h2.5
  text "0,70mm (27,56mil)" at 201.482,64.426 h2.5
  text "NPTH" at 224.389,64.426 h2.5
  text "Round" at 234.705,64.426 h2.5
  text "Top Layer - Bottom Layer" at 249.725,64.426 h2.5
  text "Pad" at 278.192,64.426 h2.5
  text "-" at 290.499,64.426 h2.5
  text "-" at 312.121,64.426 h2.5
  text "P" at 175.504,64.173 h2.3
  text "32" at 188.197,59.249 h2.5
  text "0,70mm (27,56mil)" at 201.482,59.249 h2.5
  text "PTH" at 224.389,59.249 h2.5
  text "Round" at 234.705,59.249 h2.5
  text "Top Layer - Bottom Layer" at 249.725,59.249 h2.5
  text "Pad" at 278.192,59.249 h2.5
  text "-" at 290.499,59.249 h2.5
  text "-" at 312.121,59.249 h2.5
  text "2" at 188.197,54.071 h2.5
  text "0,70mm (27,56mil)" at 201.482,54.071 h2.5
  text "PTH" at 224.389,54.071 h2.5
  text "Slot" at 234.705,54.071 h2.5
  text "Top Layer - Bottom Layer" at 249.725,54.071 h2.5
  text "Pad" at 278.192,54.071 h2.5
  text "2,20mm (86,61mil)" at 290.499,54.071 h2.5
  text "1,50mm (59,06mil)" at 312.121,54.071 h2.5
  text "2" at 188.197,48.894 h2.5
  text "0,85mm (33,47mil)" at 201.482,48.894 h2.5
  text "NPTH" at 224.389,48.894 h2.5
  text "Slot" at 234.705,48.894 h2.5
  text "Top Layer - Bottom Layer" at 249.725,48.894 h2.5
  text "Pad" at 278.192,48.894 h2.5
  text "2,42mm (95,47mil)" at 290.499,48.894 h2.5
  text "1,57mm (62,01mil)" at 312.121,48.894 h2.5
  text "25" at 188.197,43.717 h2.5
  text "0,90mm (35,43mil)" at 201.482,43.717 h2.5
  text "PTH" at 224.389,43.717 h2.5
  text "Round" at 234.705,43.717 h2.5
  text "Top Layer - Bottom Layer" at 249.725,43.717 h2.5
  text "Pad" at 278.192,43.717 h2.5
  text "-" at 290.499,43.717 h2.5
  text "-" at 312.121,43.717 h2.5
  text "2" at 188.197,38.539 h2.5
  text "0,97mm (38,19mil)" at 201.482,38.539 h2.5
  text "NPTH" at 224.389,38.539 h2.5
  text "Round" at 234.705,38.539 h2.5
  text "Top Layer - Bottom Layer" at 249.725,38.539 h2.5
  text "Pad" at 278.192,38.539 h2.5
  text "-" at 290.499,38.539 h2.5
  text "-" at 312.121,38.539 h2.5
  text "26" at 188.197,33.362 h2.5
  text "1,00mm (39,37mil)" at 201.482,33.362 h2.5
  text "PTH" at 224.389,33.362 h2.5
  text "Round" at 234.705,33.362 h2.5
  text "Top Layer - Bottom Layer" at 249.725,33.362 h2.5
  text "Pad" at 278.192,33.362 h2.5
  text "-" at 290.499,33.362 h2.5
  text "-" at 312.121,33.362 h2.5
  text "3" at 188.197,28.184 h2.5
  text "1,10mm (43,31mil)" at 201.482,28.184 h2.5
  text "NPTH" at 224.389,28.184 h2.5
  text "Round" at 234.705,28.184 h2.5
  text "Top Layer - Bottom Layer" at 249.725,28.184 h2.5
  text "Pad" at 278.192,28.184 h2.5
  text "-" at 290.499,28.184 h2.5
  text "-" at 312.121,28.184 h2.5
  text "F" at 175.504,27.931 h2.3
  text "22" at 188.197,23.007 h2.5
  text "1,10mm (43,31mil)" at 201.482,23.007 h2.5
  text "PTH" at 224.389,23.007 h2.5
  text "Round" at 234.705,23.007 h2.5
  text "Top Layer - Bottom Layer" at 249.725,23.007 h2.5
  text "Pad" at 278.192,23.007 h2.5
  text "-" at 290.499,23.007 h2.5
  text "-" at 312.121,23.007 h2.5
  text "M" at 175.504,22.753 h2.3
  text "2" at 188.197,17.829 h2.5
  text "1,19mm (46,85mil)" at 201.482,17.829 h2.5
  text "NPTH" at 224.389,17.829 h2.5
  text "Round" at 234.705,17.829 h2.5
  text "Top Layer - Bottom Layer" at 249.725,17.829 h2.5
  text "Pad" at 278.192,17.829 h2.5
  text "-" at 290.499,17.829 h2.5
  text "-" at 312.121,17.829 h2.5
  text "L" at 175.504,17.576 h2.3
  text "4" at 188.197,12.652 h2.5
  text "2,00mm (78,74mil)" at 201.482,12.652 h2.5
  text "NPTH" at 224.389,12.652 h2.5
  text "Round" at 234.705,12.652 h2.5
  text "Top Layer - Bottom Layer" at 249.725,12.652 h2.5
  text "Pad" at 278.192,12.652 h2.5
  text "-" at 290.499,12.652 h2.5
  text "-" at 312.121,12.652 h2.5
  text "B" at 175.504,12.398 h2.3
  text "4" at 188.197,7.475 h2.5
  text "3,50mm (137,80mil)" at 201.482,7.475 h2.5
  text "PTH" at 224.389,7.475 h2.5
  text "Round" at 234.705,7.475 h2.5
  text "Top Layer - Bottom Layer" at 249.725,7.475 h2.5
  text "Pad" at 278.192,7.475 h2.5
  text "-" at 290.499,7.475 h2.5
  text "-" at 312.121,7.475 h2.5
  text "E" at 175.504,7.221 h2.3
  text "2" at 188.197,2.297 h2.5
  text "4,50mm (177,17mil)" at 201.482,2.297 h2.5
  text "PTH" at 224.389,2.297 h2.5
  text "Round" at 234.705,2.297 h2.5
  text "Top Layer - Bottom Layer" at 249.725,2.297 h2.5
  text "Pad" at 278.192,2.297 h2.5
  text "-" at 290.499,2.297 h2.5
  text "-" at 312.121,2.297 h2.5
  text "Q" at 175.504,2.043 h2.3
  text "1242 Total" at 188.197,-2.88 h2.5
  text "Slot definitions :" at 176.445,-6.505 h2.5
  text "Routed Path Length" at 193.506,-6.505 h2.5
  text "= Calculated from tool start centre position to tool end centre position." at 214.642,-6.505 h2.5
  text "Hole Length" at 193.506,-8.576 h2.5
  text "= Routed Path Length + Tool Size = Slot length as defined in the PCB layout" at 206.796,-8.576 h2.5
  text ".Layer_Name" at 36.253,-23.408 h3
  text ".DRL" at 77.948,-23.408 h3
M20-Top Title Box:
  circle w0.254: c114.258,-30.129 r1.3
  region: 99.78,-31.222 89.024,-31.222 90.017,-28.729 97.875,-28.729 98.323,-27.97 100.532,-30.518
  region: 113.783,-22.892 98.256,-22.892 97.561,-24.668 96.351,-25.893 94.954,-24.033 94.954,-22.382 96.097,-20.985 97.533,-20.606 113.783,-20.606
  lines w0.254: 90.017,-28.729 98.809,-28.729 95.743,-25.191 cw(c97.546,-23.247) 97.787,-20.606 114.551,-20.606 113.789,-22.892 ; 93.331,-20.359 cw(c95.757,-21.33) 95.993,-18.727 ; 93.37,-20.327 89.024,-31.222 108.346,-31.222 ccw(c108.595,-28.487) 111.144,-29.507 ; 95.11,-24.261 100.532,-30.518 ; 95.364,-24.261 100.669,-30.383 ; 95.364,-24.007 100.669,-30.129 ; 95.462,-22.892 108.455,-22.892 ; 95.491,-23.88 100.796,-30.002 ; 95.618,-23.753 100.923,-29.875 ; 95.745,-23.626 101.05,-29.748 ; 95.872,-23.499 101.177,-29.621 ; 95.926,-21.547 101.231,-27.668 ; 95.995,-18.727 115.444,-18.727 111.145,-29.505 ; 95.999,-23.372 101.249,-29.431 ; 95.999,-23.118 101.304,-29.24 ; 95.999,-22.864 101.304,-28.986 ; 95.999,-21.975 101.304,-28.097 ; 96.126,-22.737 101.431,-28.859 ; 96.126,-22.356 101.431,-28.478 ; 97.497,-28.742 ccw(c97.602,-28.207) 97.9,-27.75 ; 98.584,-22.879 ccw(c98.558,-23.446) 98.228,-23.908 100.592,-26.637 cw(c98.789,-28.581) 99.521,-31.129 ; 104.865,-31.018 107.754,-22.638 ; 105.087,-30.968 107.957,-22.647 ; 105.214,-30.968 108.084,-22.647 ; 105.468,-30.968 108.338,-22.647 ; 105.722,-30.968 108.592,-22.647 ; 105.976,-30.968 108.846,-22.647 ; 106.23,-30.968 109.1,-22.647 ; 106.484,-30.968 109.354,-22.647 ; 106.738,-30.968 109.608,-22.647 ; 106.992,-30.968 109.862,-22.647 ; 107.201,-31.018 110.09,-22.638 ; 110.09,-22.892 113.783,-22.892 ; 113.115,-22.89 113.877,-20.604 ; 113.281,-22.892 114.043,-20.606 ; 113.535,-22.892 114.297,-20.606
  lines w0.3: 27.253,-35.108 117.253,-35.108 117.253,-15.108 27.253,-15.108 ; 27.253,-30.108 87.253,-30.108 ; 27.253,-25.108 87.253,-25.108 ; 27.253,-20.108 87.253,-20.108 ; 27.254,-35.108 27.254,-15.108 ; 67.253,-35.108 67.253,-20.108 ; 87.253,-35.108 87.253,-15.108 ; 104.865,-31.018 107.201,-31.018
  text "Project: '.Board_Name'" at 28.253,-18.324 h3
  text "Layer:" at 28.254,-23.408 h3
  text "Gerber:" at 68.242,-23.408 h3
  text "Variant: '.VariantName'" at 28.253,-28.408 h3
  text "'.Board_Reference'" at 68.369,-28.408 h3
  text "R" at 113.75,-30.891 h1.52
  text "Date: '.Board_Document_Date'" at 28.253,-33.408 h3
  text "Rev: '.Board_PCB_Revision'" at 68.312,-33.408 h3
M21-Bottom Title Box:
  circle w0.254: c30.436,-30.129 r1.3
  region: 30.911,-22.892 46.438,-22.892 47.132,-24.668 48.343,-25.893 49.74,-24.033 49.74,-22.382 48.597,-20.985 47.161,-20.606 30.911,-20.606
  region: 44.914,-31.222 55.67,-31.222 54.677,-28.729 46.819,-28.729 46.37,-27.97 44.162,-30.518
  lines w0.254: 30.397,-20.606 31.159,-22.892 ; 30.651,-20.606 31.413,-22.892 ; 30.817,-20.604 31.579,-22.89 ; 30.905,-22.892 30.143,-20.606 46.907,-20.606 cw(c47.147,-23.247) 48.951,-25.191 45.885,-28.729 54.677,-28.729 ; 30.911,-22.892 34.603,-22.892 ; 33.549,-29.505 29.249,-18.727 48.699,-18.727 ; 33.55,-29.507 ccw(c36.099,-28.487) 36.347,-31.222 55.67,-31.222 51.324,-20.327 ; 34.603,-22.638 37.493,-31.018 ; 34.832,-22.647 37.701,-30.968 ; 35.086,-22.647 37.955,-30.968 ; 35.34,-22.647 38.209,-30.968 ; 35.594,-22.647 38.463,-30.968 ; 35.848,-22.647 38.717,-30.968 ; 36.102,-22.647 38.971,-30.968 ; 36.239,-22.892 49.232,-22.892 ; 36.356,-22.647 39.225,-30.968 ; 36.61,-22.647 39.479,-30.968 ; 36.737,-22.647 39.606,-30.968 ; 36.939,-22.638 39.829,-31.018 ; 43.263,-28.859 48.568,-22.737 ; 43.263,-28.478 48.568,-22.356 ; 43.39,-29.24 48.695,-23.118 ; 43.39,-28.986 48.695,-22.864 ; 43.39,-28.097 48.695,-21.975 ; 43.445,-29.431 48.695,-23.372 ; 43.462,-27.668 48.767,-21.547 ; 43.517,-29.621 48.822,-23.499 ; 43.644,-29.748 48.949,-23.626 ; 43.771,-29.875 49.076,-23.753 ; 43.898,-30.002 49.203,-23.88 ; 44.025,-30.383 49.33,-24.261 ; 44.025,-30.129 49.33,-24.007 ; 44.162,-30.518 49.584,-24.261 ; 45.172,-31.129 cw(c45.905,-28.581) 44.101,-26.637 46.466,-23.908 ccw(c46.136,-23.446) 46.11,-22.879 ; 46.794,-27.75 ccw(c47.091,-28.207) 47.196,-28.742 ; 48.7,-18.727 cw(c48.937,-21.33) 51.363,-20.359
  lines w0.3: 37.493,-31.018 39.829,-31.018 ; 57.253,-35.108 57.253,-15.108 ; 57.253,-30.108 117.253,-30.108 ; 57.253,-25.108 117.253,-25.108 ; 57.253,-20.108 117.253,-20.108 ; 77.253,-35.108 77.253,-20.108 ; 27.253,-35.108 27.253,-15.108 117.253,-15.108 117.253,-35.108 27.253,-35.108
  text "Project: '.Board_Name'" at 116.059,-18.324 h3
  text "Gerber:" at 76.07,-23.408 h3
  text "Layer:" at 116.059,-23.408 h3
  text "'.Board_Reference'" at 76.07,-28.408 h3
  text "Variant: '.VariantName'" at 116.059,-28.408 h3
  text "R" at 30.944,-30.891 h1.52
  text "Rev: '.Board_PCB_Revision'" at 76.127,-33.408 h3
  text "Date: '.Board_Document_Date'" at 116.059,-33.408 h3

## Dimensions
0,86 to 159,86 on M2-Board Dimensions
2,0 to 2,88 on M2-Board Dimensions

## Text inside footprints (layer, text, board x,y; h text height)
CN1: M14-Top Assembly "2" at 65.77,86.39 h1.5 r180; M14-Top Assembly "3" at 60.22,86.4 h1.5 r180; M14-Top Assembly "1" at 62.863,86.425 h1.5 r180; M7-Top Info "EDGE" at 58.65,87.925 h1 r180; M7-Top Info "PCB" at 69.15,87.875 h1 r180; M15-Bottom Assembly "4" at 59.665,86.292 h1.5 r180; M15-Bottom Assembly "5" at 65.217,86.302 h1.5 r180
CN2: Top Overlay "1" at 51.35,72.05 h1.5 r90; Top Overlay "9" at 40.25,71.6 h1.5 r90; Top Overlay "10" at 39.8,80.25 h1.5 r90; M14-Top Assembly "1" at 50.2,73.55 h1.5 r90; M14-Top Assembly "9" at 41.375,73.5 h1.5 r90; M14-Top Assembly "10" at 41.05,81.925 h1.5 r90; M7-Top Info "PCB" at 37.2,88.075 h1; M7-Top Info "EDGE" at 54.775,88.075 h1
CN3: Top Overlay "Y" at 111,76.75 h1.5; Top Overlay "G" at 122.85,76.75 h1.5; Top Overlay "1" at 113.475,75.425 h1.5; M14-Top Assembly "7" at 120.15,77.9 h1.5 r180; M14-Top Assembly "8" at 121.2,77.025 h1.5 r180; M14-Top Assembly "2" at 115.075,77.025 h1.5 r180; M14-Top Assembly "1" at 113.9,77.875 h1.5 r180; M14-Top Assembly "GREEN" at 124.5,79.675 h0.8 r180; M14-Top Assembly "YELLOW" at 112.9,79.675 h0.8 r180; M7-Top Info "BOARD OUTLINE /  / CUT OUT" at 117.3,88.025 h1.52 r180; M7-Top Info "EDGE" at 110.3,89.225 h1.5 r180; M7-Top Info "PCB" at 126.9,89.225 h1.5 r180
CN4: Top Overlay "10" at 124.5,57.525 h1.5 r90; Top Overlay "1" at 128.375,32.475 h1.5 r90; M14-Top Assembly "10" at 123.711,57.343 h1.5 r270; M14-Top Assembly "9" at 127.534,54.447 h1.5 r270; M14-Top Assembly "7" at 127.534,49.361 h1.5 r270; M14-Top Assembly "8" at 123.737,51.882 h1.5 r270; M14-Top Assembly "6" at 123.737,46.802 h1.5 r270; M14-Top Assembly "4" at 123.737,41.722 h1.5 r270; M14-Top Assembly "2" at 123.737,36.642 h1.5 r270; M14-Top Assembly "5" at 127.536,44.309 h1.5 r270; M14-Top Assembly "3" at 127.536,39.209 h1.5 r270; M14-Top Assembly "1" at 127.483,33.975 h1.5 r270
CN5: Top Overlay "1" at 76.451,48.135 h1.5 r90; Top Overlay "8" at 80.151,28.46 h1.5 r90; M14-Top Assembly "1" at 76.429,47.31 h1.5 r90; M14-Top Assembly "3" at 76.376,42.075 h1.5 r90; M14-Top Assembly "5" at 76.376,36.975 h1.5 r90; M14-Top Assembly "2" at 80.176,44.643 h1.5 r90; M14-Top Assembly "4" at 80.176,39.563 h1.5 r90; M14-Top Assembly "6" at 80.176,34.483 h1.5 r90; M14-Top Assembly "8" at 80.176,29.403 h1.5 r90; M14-Top Assembly "7" at 76.378,31.924 h1.5 r90
CN6: Top Overlay "1" at 153.975,35.625 h1.5 r90; M14-Top Assembly "1" at 153.081,34.157 h1.5 r270; M14-Top Assembly "4" at 153.131,26.732 h1.5 r270
CN7: Top Overlay "14" at 9.225,19.45 h1.5 r90; Top Overlay "13" at 2.85,19.55 h1.5 r90; Top Overlay "2" at 9.2,29.8 h1.5 r90; Top Overlay "1" at 2.8,29.825 h1.5 r90; M14-Top Assembly "2" at 8.036,29.389 h1 r270; M14-Top Assembly "14" at 8.011,21.964 h1 r270; M14-Top Assembly "13" at 2.361,21.989 h1 r270; M14-Top Assembly "1" at 2.311,29.289 h1 r270
T1: Top Overlay "8" at 86.55,74.425 h1.5; Top Overlay "5" at 86.5,83.2 h1.5; Top Overlay "4" at 96.725,83.275 h1.5; Top Overlay "1" at 98.8,75.75 h1.5; M14-Top Assembly "8" at 86.103,76.61 h1.1 r180; M14-Top Assembly "7" at 86.103,78.61 h1.1 r180; M14-Top Assembly "6" at 86.113,80.605 h1.1 r180; M14-Top Assembly "5" at 86.098,82.6 h1.1 r180; M14-Top Assembly "4" at 97.988,82.61 h1.1 r180; M14-Top Assembly "3" at 97.963,80.605 h1.1 r180; M14-Top Assembly "2" at 97.968,78.615 h1.1 r180; M14-Top Assembly "1" at 97.908,76.615 h1.1 r180
T2: Top Overlay "1" at 93.375,83.925 h1.5; Top Overlay "4" at 93.175,73.8 h1.5; Top Overlay "5" at 83.6,73.725 h1.5; Top Overlay "8" at 83.35,84 h1.5; M14-Top Assembly "1" at 94.59,83.355 h1.1 r180; M14-Top Assembly "2" at 94.715,80.855 h1.1 r180; M14-Top Assembly "3" at 94.74,78.355 h1.1 r180; M14-Top Assembly "4" at 94.74,75.855 h1.1 r180; M14-Top Assembly "5" at 83.29,75.855 h1.1 r180; M14-Top Assembly "6" at 83.265,78.355 h1.1 r180; M14-Top Assembly "7" at 83.265,80.855 h1.1 r180; M14-Top Assembly "8" at 83.265,83.355 h1.1 r180
T3: Top Overlay "1" at 110.836,62.939 h1.5; Top Overlay "8" at 121.186,62.964 h1.5; Top Overlay "9" at 121.186,71.689 h1.5; Top Overlay "16" at 109.911,71.664 h1.5; M14-Top Assembly "1" at 111.571,63.109 h1.2; M14-Top Assembly "8" at 120.381,63.114 h1.2; M14-Top Assembly "9" at 120.381,71.669 h1.2; M14-Top Assembly "16" at 111.211,71.679 h1.2
T4: Top Overlay "1" at 101.644,61.653 h1.5; M14-Top Assembly "4" at 104.844,67.328 h1.5; M14-Top Assembly "1" at 102.669,61.603 h1.5; M14-Top Assembly "2" at 104.819,61.578 h1.5; M14-Top Assembly "3" at 107.119,61.553 h1.5
U1: Top Overlay "1" at 81.175,71 h1.5; M14-Top Assembly "1" at 80.975,71.6 h1 r180; M14-Top Assembly "4" at 79.125,71.575 h1 r180; M14-Top Assembly "8" at 81.075,67.475 h1 r180; M14-Top Assembly "5" at 79.1,67.475 h1 r180
U2: Top Overlay "1" at 92.536,69.939 h1.5 r90; M14-Top Assembly "1" at 92.336,69.389 h1.2 r90; M14-Top Assembly "2" at 92.336,67.989 h1.2 r90; M14-Top Assembly "3" at 98.361,68.014 h1.2 r90; M14-Top Assembly "4" at 98.361,69.264 h1.2 r90
U3: Top Overlay "1" at 83.036,65.939 h1.5
U6: M14-Top Assembly "A1" at 72.2,56.775 h0.75 r180
U7: Top Overlay "A2" at 35,53.125 h1.3; M14-Top Assembly "A2" at 35.474,54.63 h0.75 r180; M14-Top Assembly "E1" at 36.354,58.63 h0.75 r180; M14-Top Assembly "D1" at 36.369,57.63 h0.75 r180; M14-Top Assembly "C1" at 36.41,56.63 h0.75 r180; M14-Top Assembly "B1" at 36.369,55.63 h0.75 r180; M14-Top Assembly "A5" at 32.449,54.63 h0.75 r180; M14-Top Assembly "A4" at 33.456,54.605 h0.75 r180; M14-Top Assembly "A3" at 34.474,54.63 h0.75 r180
U8: Top Overlay "1" at 99.651,47.871 h1.5; M14-Top Assembly "1" at 100.209,48.203 h0.75; M14-Top Assembly "8" at 104.696,48.218 h0.75; M14-Top Assembly "9" at 104.699,53.714 h0.75; M14-Top Assembly "16" at 99.976,53.696 h0.75; M14-Top Assembly "EP" at 102.176,50.971 h0.75
U9: Top Overlay "1" at 118.9,47.175 h1.5; M14-Top Assembly "25" at 117.05,50.025 h0.65 r180; M14-Top Assembly "1" at 119.225,48.475 h0.65 r90; M14-Top Assembly "7" at 118.15,52.25 h0.65 r180; M14-Top Assembly "12" at 115.775,52.25 h0.65 r180; M14-Top Assembly "13" at 114.3,51.325 h0.65 r270; M14-Top Assembly "18" at 114.3,48.825 h0.65 r270; M14-Top Assembly "19" at 115.775,47.75 h0.65 r180; M14-Top Assembly "24" at 118.325,47.75 h0.65 r180; M14-Top Assembly "6" at 119.2,50.925 h0.65 r90
U10: Top Overlay "A2" at 66.175,35.125 h1.5 r90; M14-Top Assembly "A2" at 64.57,35.974 h0.75 r270; M14-Top Assembly "E1" at 60.57,36.854 h0.75 r270; M14-Top Assembly "D1" at 61.57,36.869 h0.75 r270; M14-Top Assembly "C1" at 62.57,36.91 h0.75 r270; M14-Top Assembly "B1" at 63.57,36.869 h0.75 r270; M14-Top Assembly "A5" at 64.57,32.949 h0.75 r270; M14-Top Assembly "A4" at 64.595,33.956 h0.75 r270; M14-Top Assembly "A3" at 64.57,34.974 h0.75 r270
U11: Top Overlay "1" at 103.275,36.725 h1.5 r90
U13: M14-Top Assembly "A1" at 110.833,23.127 h0.75 r90
U14: Top Overlay "1" at 53.475,27.2 h1.5 r90
U15: Top Overlay "1" at 87.2,28.8 h1.5 r90; M14-Top Assembly "4" at 92.325,25.7 h1.5 r270; M14-Top Assembly "1" at 86.6,27.875 h1.5 r270; M14-Top Assembly "2" at 86.575,25.725 h1.5 r270; M14-Top Assembly "3" at 86.55,23.425 h1.5 r270
U17: Top Overlay "1" at 100.275,25.175 h1.5 r90
U19: Top Overlay "1" at 37.175,22.575 h1.5 r90; M14-Top Assembly "4" at 39.56,20.32 h0.75 r270; M14-Top Assembly "5" at 39.575,21.25 h0.75 r270; M14-Top Assembly "6" at 39.575,22.2 h0.75 r270; M14-Top Assembly "1" at 37.225,22.15 h0.75 r270; M14-Top Assembly "3" at 37.22,20.32 h0.75 r270; M14-Top Assembly "2" at 37.225,21.25 h0.75 r270
U20: M14-Top Assembly "1" at 55.875,21.8 h1.5 r180; M14-Top Assembly "4" at 52.2,21.825 h1.5 r180; M14-Top Assembly "5" at 52.175,16.625 h1.5 r180; M14-Top Assembly "8" at 56,16.6 h1.5 r180
U21: M14-Top Assembly "1" at 63.875,21.8 h1.5 r180; M14-Top Assembly "4" at 60.2,21.825 h1.5 r180; M14-Top Assembly "5" at 60.175,16.625 h1.5 r180; M14-Top Assembly "8" at 64,16.6 h1.5 r180
U22: M14-Top Assembly "1" at 72.375,21.8 h1.5 r180; M14-Top Assembly "4" at 68.7,21.825 h1.5 r180; M14-Top Assembly "5" at 68.675,16.625 h1.5 r180; M14-Top Assembly "8" at 72.5,16.6 h1.5 r180
U23: Top Overlay "1" at 112.886,11.389 h1.5 r90
U24: Top Overlay "1" at 91.225,14.5 h1.5 r90
U25: Top Overlay "1" at 85.85,6.345 h1.5 r90; M14-Top Assembly "4" at 82.99,8.88 h0.75 r90; M14-Top Assembly "5" at 82.975,7.95 h0.75 r90; M14-Top Assembly "6" at 82.975,7 h0.75 r90; M14-Top Assembly "1" at 85.325,7.05 h0.75 r90; M14-Top Assembly "3" at 85.33,8.88 h0.75 r90; M14-Top Assembly "2" at 85.325,7.95 h0.75 r90
U26: Top Overlay "1" at 52.55,5.6 h1.2; M14-Top Assembly "3" at 53.7,7.85 h0.75; M14-Top Assembly "2" at 54.35,5.975 h0.75; M14-Top Assembly "1" at 53.1,5.975 h0.75
U27: Top Overlay "1" at 60.8,5.6 h1.2; M14-Top Assembly "3" at 61.95,7.85 h0.75; M14-Top Assembly "2" at 62.6,5.975 h0.75; M14-Top Assembly "1" at 61.35,5.975 h0.75
U28: Top Overlay "1" at 69.55,5.6 h1.2; M14-Top Assembly "3" at 70.7,7.85 h0.75; M14-Top Assembly "2" at 71.35,5.975 h0.75; M14-Top Assembly "1" at 70.1,5.975 h0.75
U29: Top Overlay "1" at 115.2,8 h1.3; M14-Top Assembly "1" at 114.761,8.064 h0.5 r180; M14-Top Assembly "2" at 114.286,8.064 h0.5 r180; M14-Top Assembly "3" at 113.786,8.064 h0.5 r180; M14-Top Assembly "4" at 113.796,6.881 h0.5 r180; M14-Top Assembly "5" at 114.286,6.889 h0.5 r180; M14-Top Assembly "6" at 114.786,6.889 h0.5 r180
U30: M14-Top Assembly "2" at 111.336,7.339 h0.75 r90; M14-Top Assembly "1" at 111.336,7.339 h0.75 r90
U31: M15-Bottom Assembly "2" at 147.5,66.375 h0.75 r270; M15-Bottom Assembly "1" at 147.5,66.375 h0.75 r270
U32: M15-Bottom Assembly "1" at 147.325,52 h0.75; M15-Bottom Assembly "2" at 147.325,52 h0.75
U33: Bottom Overlay "1" at 35.975,5.325 h1.5; M15-Bottom Assembly "4" at 38.2,4.375 h1 r90; M15-Bottom Assembly "3" at 39.525,4.35 h1 r90; M15-Bottom Assembly "2" at 39.55,5.325 h1 r90; M15-Bottom Assembly "1" at 38.025,5.1 h1 r90
U34: M14-Top Assembly "K" at 9.4,23.925 h0.45
X1: M14-Top Assembly "4" at 79.1,60.75 h0.6 r90; M14-Top Assembly "3" at 79.1,62.35 h0.6 r90; M14-Top Assembly "2" at 80.225,62.35 h0.6 r90; M14-Top Assembly "1" at 80.225,60.8 h0.6 r90
X3: M14-Top Assembly "4" at 111.861,18.964 h0.6; M14-Top Assembly "3" at 113.461,18.964 h0.6; M14-Top Assembly "2" at 113.461,17.839 h0.6; M14-Top Assembly "1" at 111.911,17.839 h0.6